# Altium PCB coffee_roaster.PcbDoc
Units mil, origin at the board's own origin, x right, y up, seen from the top; angles counter-clockwise.
Board outline 3450 x 3150 mil, 2 copper layers (Top, Bottom), stack 61.811 mil thick; 15 components, 24 nets, 98 pads, 7 vias.
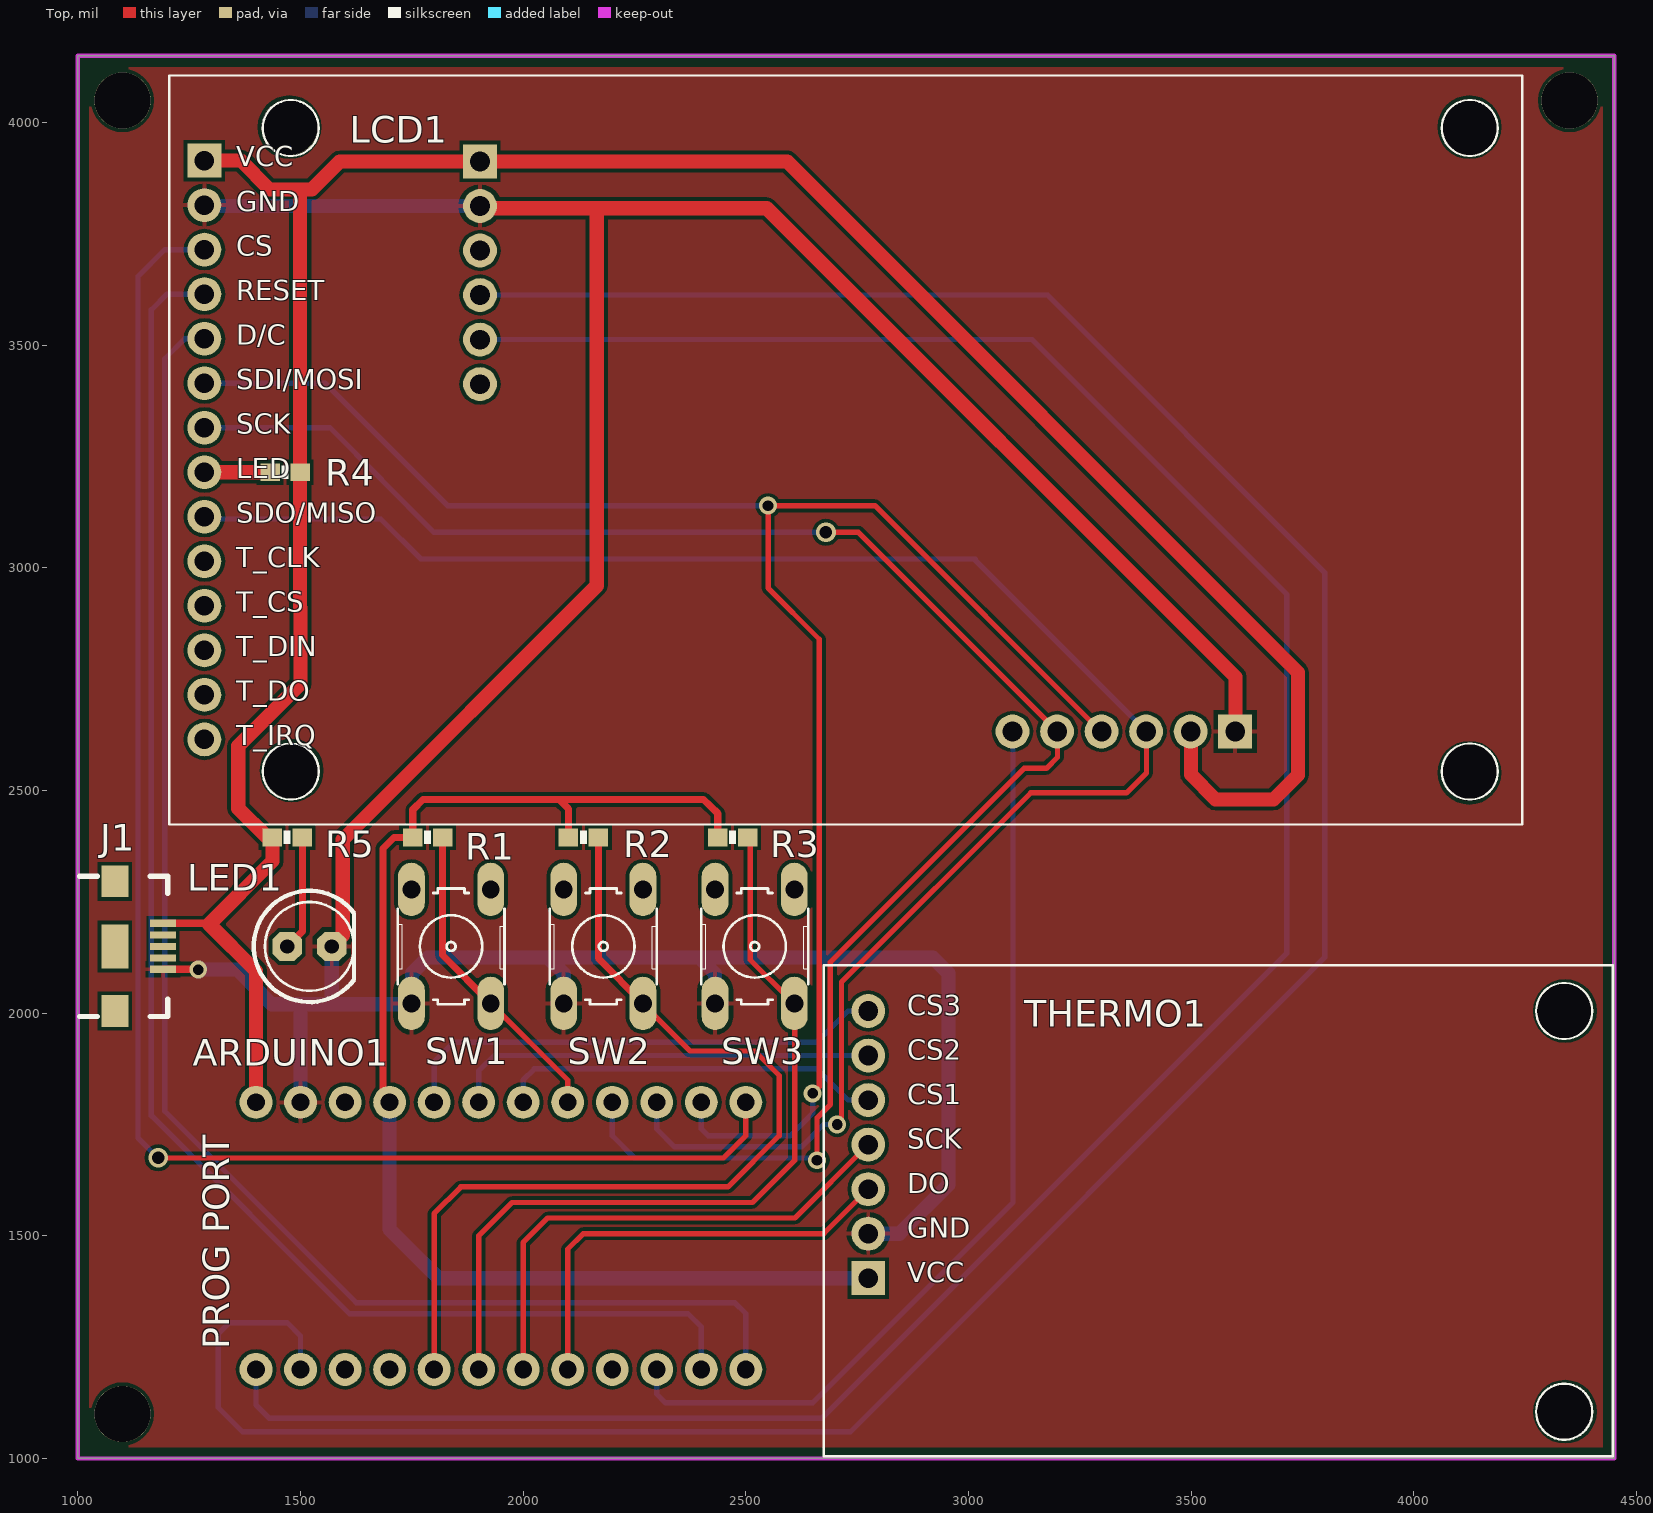
[diagram p0: Top view]
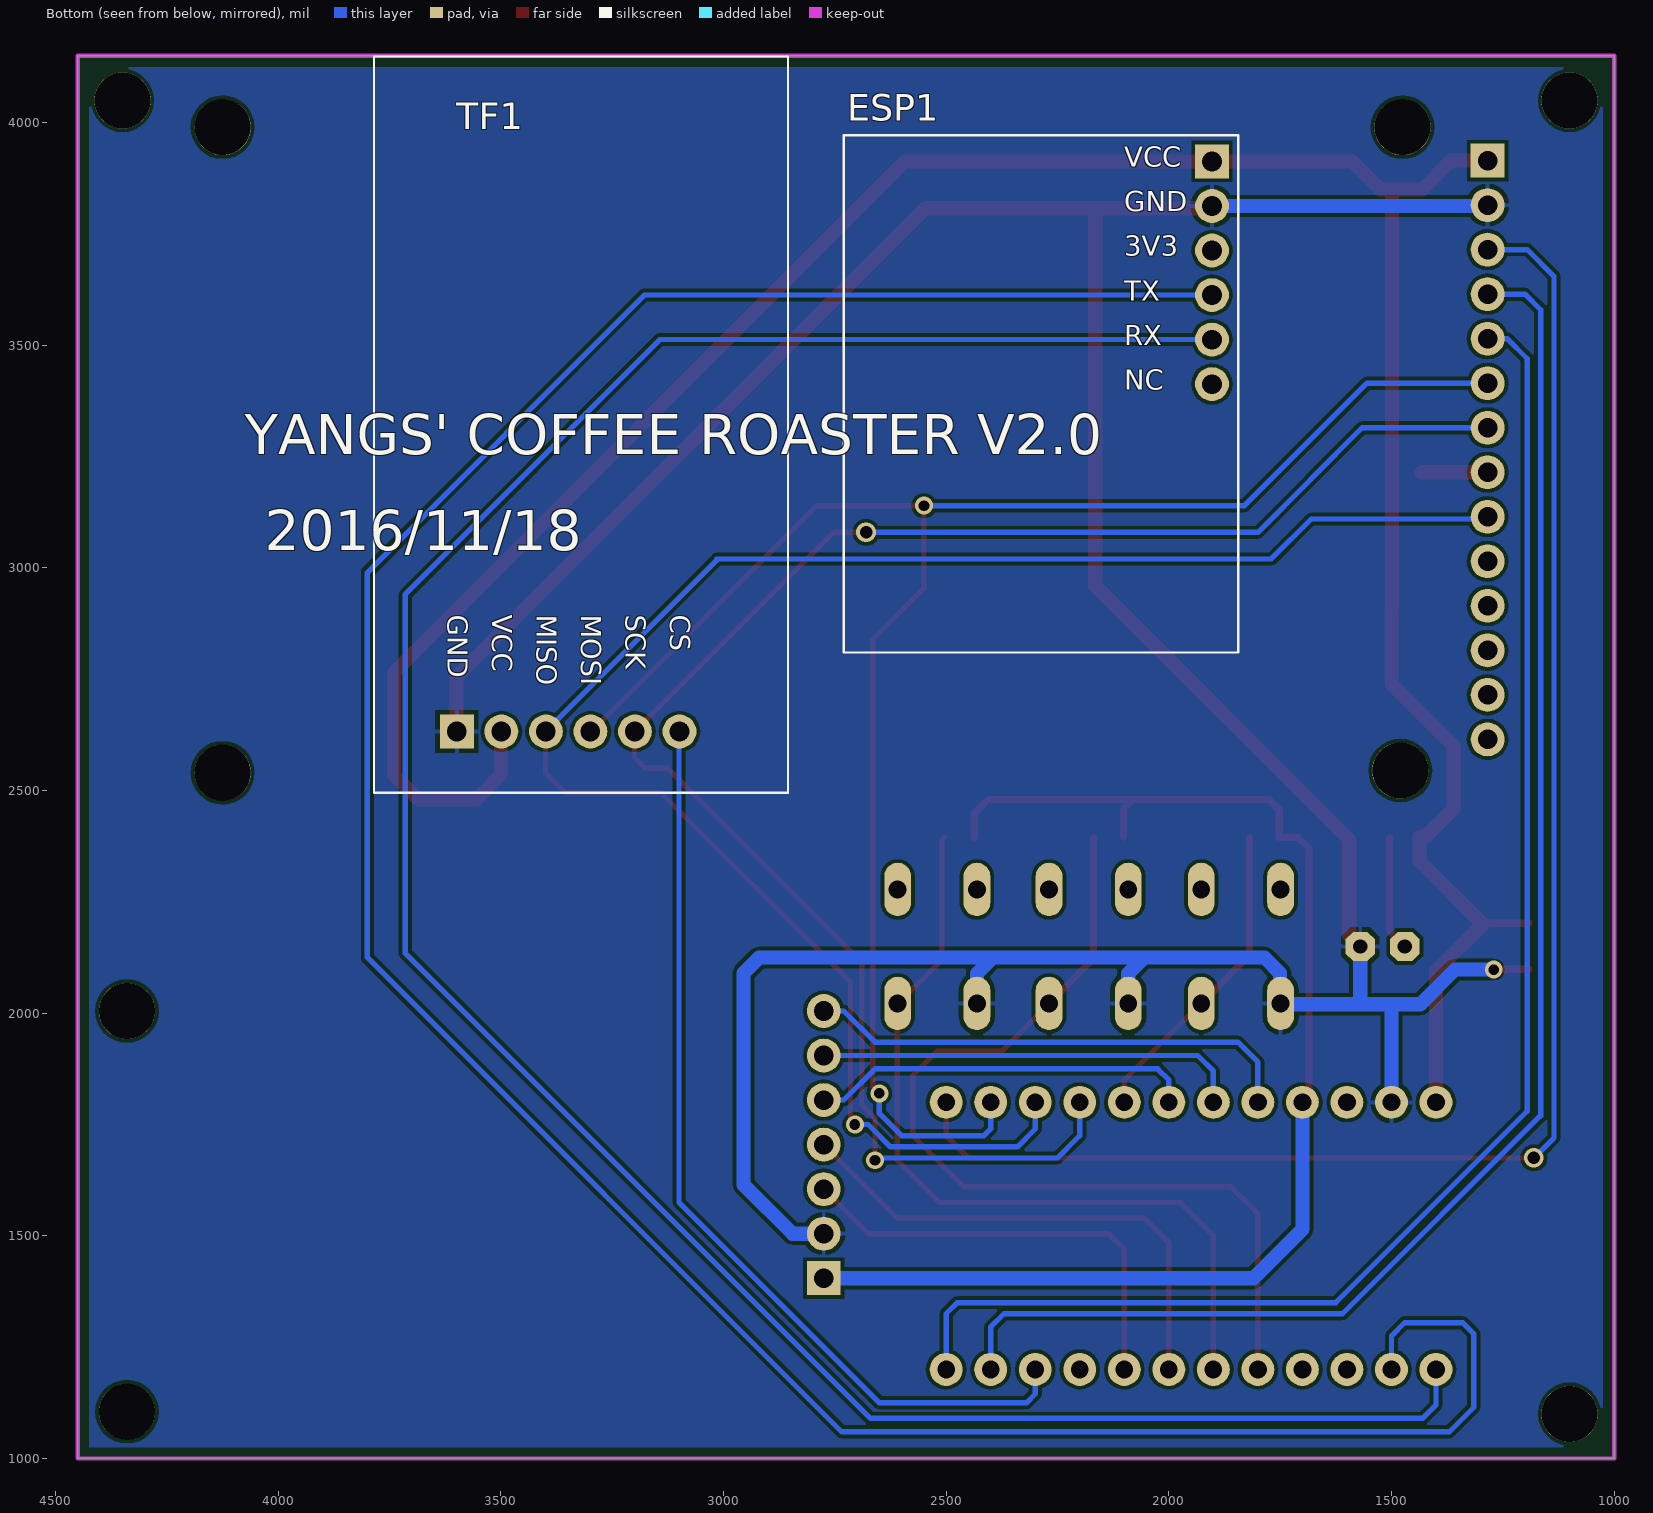
[diagram p1: Bottom view, seen from below]

## Layer stack, top to bottom
Top Solder: solder mask 0.4, Solder Resist, Dk 3.5
Top: signal copper 1.378
Dielectric 1: core 59.0551, FR-4, Dk 4.8
Bottom: signal copper 1.378
Bottom Solder: solder mask 0.4, Solder Resist, Dk 3.5

## Board outline
1000,1000 4450,1000 4450,4150 1000,4150

## Design rules (kind name [scope] priority, off if disabled: settings)
Clearance mdViaVia [IsVia vs IsVia] p1: gap=8
Clearance mdPadVia [IsPad vs IsVia] p2: gap=8
Clearance mdPadPad [IsPad vs IsPad] p3: gap=8
Clearance mdWireVia [(InLayerClass('Signal Layers') AND IsTrack) vs IsVia] p4: gap=8
Clearance mdWirePad [(InLayerClass('Signal Layers') AND IsTrack) vs IsPad] p5: gap=8
Clearance mdWireWire [(InLayerClass('Signal Layers') AND IsTrack) vs (InLayerClass('Signal Layers') AND IsTrack)] p6: gap=8
Clearance [All] p7: gap=8
HoleSize [All] p1: absolutevalues=TRUE maxlimit=100000 minlimit=24 maxpercent=80.000 minpercent=20.000
HoleToHoleClearance [All] p1: gap=8 allowstackedmicrovias=TRUE
PolygonConnect ThermalVias [IsVia] p1: connectstyle=Direct reliefconductorwidth=10 reliefentries=4 polygonreliefangle="90 Angle" airgapwidth=10
PolygonConnect [All] p2: connectstyle=Relief reliefconductorwidth=10 reliefentries=4 polygonreliefangle="90 Angle" airgapwidth=10
RoutingVias [All] p1: holewidth=28 width=50 viastyle="Through Hole" minholewidth=28 minwidth=50 maxholewidth=28 maxwidth=50
SilkToSilkClearance [All] p1 off: silktosilkclearance=10
SilkToSolderMaskClearance [IsPad] p1 off: minsilkscreentomaskgap=10 clearancetoexposedcopper=TRUE
SolderMaskExpansion [All] p1: expansion=4
Width [All] p1: maxlimit=100000 minlimit=10 preferedwidth=10
26 further rules are at their usual default settings.

## Components (designator, comment, footprint, x,y, rotation, side; value= is the part's Value field where it differs from the comment)
ARDUINO1 "" ARDUINO_PRO_MINI 1900,1500 r90 top
ESP1 "" ESP12EF_ADAPTOR 2730,2810 r180 bottom
J1 "" USB-B-MICRO-SMD_V03_RED_PASTE 1083,2150 r0 top
LCD1 "" 2.4TFT_SPI_240X320_LCD_ILI9341 1205,2424 r0 top
LED1 "" LED5MM 1520,2150 r0 top
R1 "" 0603-RES 1785,2395 r0 top
R2 "" 0603-RES 2135,2395 r0 top
R3 "" 0603-RES 2470,2395 r0 top
R4 "" 0603-RES 1465,3215 r0 top
R5 "" 0603-RES 1470,2395 r180 top
SW1 "" B3F-10XX 1838,2150 r90 top
SW2 "" B3F-10XX 2180,2150 r90 top
SW3 "" B3F-10XX 2520,2150 r90 top
TF1 "" CATALEX_MICROSD_CARD_ADAPTOR 3785,2495 r270 bottom
THERMO1 "" 3_CHANNEL_THERMOCOUPLE 2675,1005 r0 top (schematic designator Thermocouple)

## Footprints (in the part's own frame and the unit in brackets; to place one, negate y for a bottom-side part, rotate by r counter-clockwise, add the part's x,y. Pads: shape width x height; smd on the part's side, far side on the other; paste and mask are expansions set on the pad)
2.4TFT_SPI_240X320_LCD_ILI9341 [mil] "2.4TFT_SPI_240X320_LCD_ILI9341"
  round 76 hole 44: CS(79,1291) D/C(79,1091) GND(79,1391) LED(79,791) RESET(79,1191) SCK(79,891) SDI/MOSI(79,991) SDO/MISO(79,691) T_CLK(79,591) T_CS(79,491) T_DIN(79,391) T_DO(79,291) T_IRQ(79,191)
  rect 76x76 hole 44: VCC(79,1491)
  silkscreen extent 0,0 3039,1682
3_CHANNEL_THERMOCOUPLE [mil] "3_CHANNEL_THERMOCOUPLE"
  round 76 hole 44: CS1(100,800) CS2(100,900) CS3(100,1000) DO(100,600) GND(100,500) SCK(100,700)
  rect 76x76 hole 44: VCC(100,400)
  silkscreen extent 0,0 1772,1103
0603-RES [mil] "0603-RES"
  rect 44x40 smd: 1(-33.46,0) 2(34,0)
  silkscreen extent -8,-15 8,15
ARDUINO_PRO_MINI [mil] "ARDUINO_PRO_MINI"
  round 74 hole 40: 1(-300,500) 2(-300,400) 3(-300,300) 4(-300,200) 5(-300,100) 6(-300,0) 7(-300,-100) 8(-300,-200) 9(-300,-300) 10(-300,-400) 11(-300,-500) 12(-300,-600) 13(300,-600) 14(300,-500) 15(300,-400) 16(300,-300) 17(300,-200) 18(300,-100) 19(300,0) 20(300,100) 21(300,200) 22(300,300) 23(300,400) 24(300,500)
B3F-10XX [mil] "B3F-10XX"
  oval 120x60 hole 40: 1(-128,89) 2(128,89) 3(-128,-89) 4(128,-89)
  silkscreen extent -130,-120 130,120
CATALEX_MICROSD_CARD_ADAPTOR [mil] "CATALEX_MICROSD_CARD_ADAPTOR"
  round 76 hole 44: CS(-137.8,686) MISO(-137.8,386) MOSI(-137.8,486) SCK(-137.8,586) VCC(-137.8,286)
  rect 76x76 hole 44: GND(-137.8,186)
  silkscreen extent -1654,0 0,930
ESP12EF_ADAPTOR [mil] "ESP12EF_ADAPTOR"
  round 76 hole 44: 3V3(827,903) GND(827,1003) NC(827,603) RX(827,703) TX(827,803)
  rect 76x76 hole 44: VCC(827,1103)
  silkscreen extent 0,0 886,1162
LED5MM [mil] "LED5MM"
  oct 66x66 hole 32: A(-50,0) K(50,0)
  silkscreen extent -125,-125 100,125
USB-B-MICRO-SMD_V03_RED_PASTE [mil] "USB-B-MICRO-SMD_V03_RED_PASTE"
  rect 58x16 smd: D+(108,0) D-(108,26) GND(108,-51.18) ID(108,-25.59) VBUS(108,52)
  rect 60x71 smd: SHIELD1(0,146) SHIELD2(0,-145.08)
  rect 60x99 smd: SHIELD3(0,0)
  silkscreen extent -79,-157 119,158

## Part data
ARDUINO1: library part ARDUINO_PRO_MINI
ESP1: library part ESP12EF_ADAPTOR
J1: library part USB-B-MICRO-SMD_V03_RED_PASTE
LCD1: library part 2.4TFT_SPI_240X320_LCD_ILI9341
LED1: library part LED5MM
R1 R2 R3 R4 R5: library part 0603-RES
SW1 SW2 SW3: library part B3F-10XX
TF1: library part CATALEX_MICROSD_CARD_ADAPTOR
THERMO1: library part 3_CHANNEL_THERMOCOUPLE

## Free pads (board coordinates)
  round 126 hole 126: 1(1100,1100) 1(1100,4050) 1(1475,3990) 1(1480,2545) 1(4125,2540) 1(4125,3990) 1(4340,1105) 1(4340,2005) 1(4350,4050)

## Via types
v1: diameter 40/40 (per signal layer), hole 24, Top to Bottom, 5 vias
v2: diameter 44/44 (per signal layer), hole 28, Top to Bottom, 2 vias

## Nets (pads, with @x,y where several pads share a name; then routed paths per layer and width w, separated by ;. In a path a pad name is that pad's centre, name@x,y a point inside that pad or via, vN(x,y) a via of type N, cw(c..) or ccw(c..) an arc to the next point about the centre after c; other vN are vias at no path point)
+5V: ARDUINO1.24 ESP1.VCC J1.VBUS LCD1.VCC R4.2 R5.2 TF1.VCC | length 5954.7
  Top w16: J1.VBUS 1293,2202
  Top w32: LCD1.VCC 1366,3915 1430,3850 1499,3850 ; ARDUINO1.24 1400,2095 1295,2200 1437,2342 1437,2395 1425,2395 1360,2460 1360,2600 1500,2740 1500,2910 1499,2912 R4.2 1499,3850 ; ESP1.VCC@1902,3915 ESP1.VCC@1904,3913 ; TF1.VCC@3500,2633 3500,2536 3555,2480 3685,2480 3740,2535 3740,2765 2593,3913 ESP1.VCC@1904,3913 ; 1499,3850 1525,3850 1588,3913 ESP1.VCC@1904,3913
  Top w40: ESP1.VCC@1904,3913 ESP1.VCC@1904,3915
CSTF: ARDUINO1.10 TF1.CS | length 2107.7
  Bottom w12: ARDUINO1.10 2300,1145 2320,1125 2650,1125 3100,1575 TF1.CS@3100,2633
GND: ARDUINO1.23 ESP1.GND J1.GND LCD1.GND LED1.K SW1.1 SW2.1 SW3.1 TF1.GND THERMO1.GND | length 7988.4
  Top w12: J1.GND@1190,2099 1190.97,2099.1 J1.GND@1200,2100 ; v1(1270,2098) v1@1275,2100
  Top w16: J1.GND v1@1269.18,2098.82 ; ESP1.GND@1904,3813 ESP1.GND@1912,3808
  Top w32: LED1.K 1595,2175 1595,2390 2165,2960 2165,3808 ; ESP1.GND@1909,3808 1912,3808 2165,3808 ; TF1.GND@3600,2633 3600,2755 2547,3808 2165,3808
  Bottom w16: 1570,2032 1576,2032
  Bottom w32: v1(1270,2098) 1357,2098 1435,2020 1510,2020 ; LCD1.GND 1286,3813 ESP1.GND@1904,3813 ; ARDUINO1.23 1500,2010 1510,2020 ; 1570,2020 1570,2032 LED1.K ; SW2.1 2091,2089 2055,2125 ; SW3.1 2431,2089 2395,2125 ; THERMO1.GND 2845,1505 2955,1615 2955,2090 2920,2125 2395,2125 ; 1510,2020 1747,2020 SW1.1 1750,2024 1750,2090 1785,2125 2055,2125 ; 2055,2125 2395,2125
LCDCS: ARDUINO1.13 LCD1.CS | length 3588.2
  Top w12: v2(1180,1675) 2450,1675 2500,1725 ARDUINO1.13
  Bottom w12: v2(1180,1675) 1135,1720 1135,3655 1195,3715 LCD1.CS
LCDDC: ARDUINO1.12 LCD1.D/C | length 3416.1
  Bottom w12: LCD1.D/C 1240,3515 1195,3470 1195,1780 1625,1350 2475,1350 2500,1325 ARDUINO1.12
LCDRST: ARDUINO1.11 LCD1.RESET | length 3470.2
  Bottom w12: LCD1.RESET 1200,3615 1165,3580 1165,1770 1610,1325 2370,1325 2400,1295 ARDUINO1.11
MAX6675_CS1: ARDUINO1.18 THERMO1.CS1 | length 864.4
  Bottom w12: ARDUINO1.18 2000,1850 2025,1875 2660,1875 2730,1805 THERMO1.CS1
MAX6675_CS2: ARDUINO1.19 THERMO1.CS2 | length 959.5
  Bottom w12: ARDUINO1.19 1900,1870 1935,1905 THERMO1.CS2
MAX6675_CS3: ARDUINO1.20 THERMO1.CS3 | length 1112.6
  Bottom w12: ARDUINO1.20 1800,1890 1845,1935 2660,1935 2730,2005 THERMO1.CS3
MAX6675_DO: ARDUINO1.8 THERMO1.DO | length 1000.9
  Top w12: ARDUINO1.8 2100,1470 2135,1505 2675,1505 THERMO1.DO
MAX6675_SCK: ARDUINO1.7 THERMO1.SCK | length 1151.1
  Top w12: ARDUINO1.7 2000,1485 2055,1540 2610,1540 THERMO1.SCK
MISO: ARDUINO1.15 LCD1.SDO/MISO TF1.MISO | length 4120.7
  Top w12: v1@2710,1750 v1(2705,1750) 2715,1760 2715,2070 3140,2495 3355,2495 3400,2540 TF1.MISO@3400,2633
  Bottom w12: LCD1.SDO/MISO 1290,3110 1680,3110 1770,3020 3015,3020 3015,3018 TF1.MISO@3400,2633 ; ARDUINO1.15 2300,1740 2340,1700 2625,1700 2675,1750 v1(2705,1750)
MOSI: ARDUINO1.14 LCD1.SDI/MOSI TF1.MOSI | length 4095
  Top w12: v1(2650,1820) 2665,1835 2665,2840 2550,2955 v1(2550,3140) 2790,3140 3290,2640 TF1.MOSI@3300,2633
  Bottom w12: LCD1.SDI/MOSI 1555,3415 1830,3140 v1(2550,3140) ; ARDUINO1.14 2400,1740 2415,1725 2600,1725 2650,1775 v1(2650,1820)
N$1: LCD1.LED R4.1 | length 148
  Top w32: LCD1.LED R4.1@1432,3215
N$2: 
N$3: LED1.A R5.1 | length 259.1
  Top w16: LED1.A 1504,2184 R5.1@1504,2395
N$4: 
N$5: ARDUINO1.1 ESP1.RX | length 5693.9
  Bottom w12: ARDUINO1.1 1400,1120 1430,1090 2670,1090 3715,2135 3715,2940 3143,3513 ESP1.RX@1904,3513
N$18: ARDUINO1.2 ESP1.TX | length 6416
  Bottom w12: ARDUINO1.2 1500,1275 1470,1305 1340,1305 1315,1280 1315,1115 1370,1060 2735,1060 3800,2125 3800,2990 3178,3613 ESP1.TX@1904,3613
PB1: ARDUINO1.17 R1.2 SW1.3 | length 711.5
  Top w12: SW1.3 1930,2020 2100,1850 ARDUINO1.17
  Top w16: R1.2 1819,2131 SW1.3
PB2: ARDUINO1.5 R2.2 SW2.3 | length 2120.1
  Top w12: ARDUINO1.5 1800,1550 1860,1610 2460,1610 2575,1725 2575,1860 2520,1915 2375,1915 2270,2020 SW2.3
  Top w16: R2.2 2169,2123 SW2.3
PB3: ARDUINO1.6 R3.2 SW3.3 | length 1850.5
  Top w12: ARDUINO1.6 1900,1500 1975,1575 2515,1575 2610,1670 2610,2022 SW3.3 2600,2030 2510,2120 2510,2390 R3.2
SCK: ARDUINO1.16 LCD1.SCK TF1.SCK | length 3971.6
  Top w12: v1(2660,1670) 2660,1765 2690,1795 2690,2115 3125,2550 3175,2550 3200,2575 3200,2633 2753,3080 v2(2680,3080)
  Bottom w12: LCD1.SCK 1566,3315 1800,3080 v2(2680,3080) ; ARDUINO1.16 2200,1725 2250,1675 2650,1675 v1(2660,1670)
VCC_3V3: ARDUINO1.21 R1.1 R2.1 R3.1 THERMO1.VCC | length 2976.6
  Top w16: ARDUINO1.21 1685,1815 1685,2370 1710,2395 1752,2395 1752,2457 1775,2480 2080,2480 ; R2.1@2102,2395 2102,2459 2080,2480 ; R3.1@2437,2395 2437,2449 2405,2480 2080,2480
  Bottom w32: ARDUINO1.21 1700,1515 1810,1405 THERMO1.VCC
pads on no net: ARDUINO1.3 ARDUINO1.4 ARDUINO1.9 ARDUINO1.22 ESP1.3V3 ESP1.NC J1.D+ J1.D- J1.ID J1.SHIELD1 J1.SHIELD2 J1.SHIELD3 LCD1.T_CLK LCD1.T_CS LCD1.T_DIN LCD1.T_DO LCD1.T_IRQ SW1.2 SW1.4 SW2.2 SW2.4 SW3.2 SW3.4

## Polygon pours and split planes (outlines as drawn)
GND on Top "Top-No Net" (solid, remove dead copper, pour order 4): 1025,4125 4425,4125 4425,1025 1025,1025 1025,4125
GND on Bottom "Top-No Net" (solid, pour order 2): 1025,4125 4425,4125 4425,1025 1025,1025 1025,4125

## Keep-outs
Keep-Out Layer:
  lines w0: 1000,1000 4450,1000 4450,4150 1000,4150 1000,1000
  lines w10: 1000,1000 1000,4150 4450,4150 4450,1000 1000,1000

## Silkscreen, mask and mechanical layers (free items; w line width, h text height)
Top Overlay:
  text "PROG PORT" at 1340,1245 h60 r90
Bottom Overlay:
  text "YANGS' COFFEE ROASTER V2.0" at 4075,3225 h155
  text "2016/11/18" at 4030,3010 h155
Dimension:
  the board outline again, w0

## Text inside footprints (layer, text, board x,y; h text height)
ESP1: Bottom Overlay "VCC" at 2100,3885 h77.5; Bottom Overlay "GND" at 2100,3785 h77.5; Bottom Overlay "3V3" at 2100,3685 h77.5; Bottom Overlay "TX" at 2100,3585 h77.5; Bottom Overlay "RX" at 2100,3485 h77.5; Bottom Overlay "NC" at 2100,3385 h77.5
J1: tNames ">NAME" at 1033,2385 h24.8; tValues ">VALUE" at 1033,2365 h24.8; tDocu "PCB Front" at 899.54,2385 h18.6
LCD1: Top Overlay "VCC" at 1355,3886 h77.5; Top Overlay "GND" at 1355,3786 h77.5; Top Overlay "CS" at 1355,3686 h77.5; Top Overlay "RESET" at 1355,3586 h77.5; Top Overlay "D/C" at 1355,3486 h77.5; Top Overlay "SDI/MOSI" at 1355,3386 h77.5; Top Overlay "SCK" at 1355,3286 h77.5; Top Overlay "LED" at 1355,3186 h77.5; Top Overlay "SDO/MISO" at 1355,3086 h77.5; Top Overlay "T_CLK" at 1355,2986 h77.5; Top Overlay "T_CS" at 1355,2886 h77.5; Top Overlay "T_DIN" at 1355,2786 h77.5; Top Overlay "T_DO" at 1355,2686 h77.5; Top Overlay "T_IRQ" at 1355,2586 h77.5
LED1: tNames ">NAME" at 1645,2171 h77.5; tValues ">VALUE" at 1646,2079 h77.5
R1: tNames ">NAME" at 1750,2425 h13.6; tValues ">VALUE" at 1745,2350 h13.6
R2: tNames ">NAME" at 2100,2425 h13.6; tValues ">VALUE" at 2095,2350 h13.6
R3: tNames ">NAME" at 2435,2425 h13.6
R4: tNames ">NAME" at 1430,3245 h13.6; tValues ">VALUE" at 1425,3170 h13.6
R5: tNames ">NAME" at 1505,2365 h13.6 r180; tValues ">VALUE" at 1510,2440 h13.6 r180
SW1: tNames ">NAME" at 1693,2080 h62 r90; tValues ">VALUE" at 1963,2245 h62 r270; tDocu "1" at 1773,1980 h77.5 r90; tDocu "2" at 1778,2290 h77.5 r90; tDocu "3" at 1948,1970 h77.5 r90; tDocu "4" at 1948,2290 h77.5 r90
SW2: tNames ">NAME" at 2035,2080 h62 r90; tDocu "1" at 2115,1980 h77.5 r90; tDocu "2" at 2120,2290 h77.5 r90; tDocu "3" at 2290,1970 h77.5 r90; tDocu "4" at 2290,2290 h77.5 r90
SW3: tDocu "1" at 2455,1980 h77.5 r90; tDocu "2" at 2460,2290 h77.5 r90; tDocu "3" at 2630,1970 h77.5 r90; tDocu "4" at 2630,2290 h77.5 r90
TF1: Bottom Overlay "GND" at 3635,2895 h77.5 r90; Bottom Overlay "VCC" at 3535,2895 h77.5 r90; Bottom Overlay "MISO" at 3435,2895 h77.5 r90; Bottom Overlay "MOSI" at 3335,2895 h77.5 r90; Bottom Overlay "SCK" at 3235,2895 h77.5 r90; Bottom Overlay "CS" at 3135,2895 h77.5 r90
THERMO1: Top Overlay "VCC" at 2863,1380 h77.5; Top Overlay "GND" at 2863,1480 h77.5; Top Overlay "DO" at 2863,1580 h77.5; Top Overlay "SCK" at 2863,1680 h77.5; Top Overlay "CS1" at 2863,1780 h77.5; Top Overlay "CS2" at 2863,1880 h77.5; Top Overlay "CS3" at 2863,1980 h77.5